# Altium PCB PD_SMARTKEY_EMN-EVAN_V2.0.PcbDoc (part 2 of 2)
Units mm, origin at the board's own origin, x right, y up, seen from the top; angles counter-clockwise.
Board outline 43.7 x 59.1 mm, 2 copper layers (Top Layer, Bottom Layer); 132 components, 88 nets, 381 pads, 398 vias.
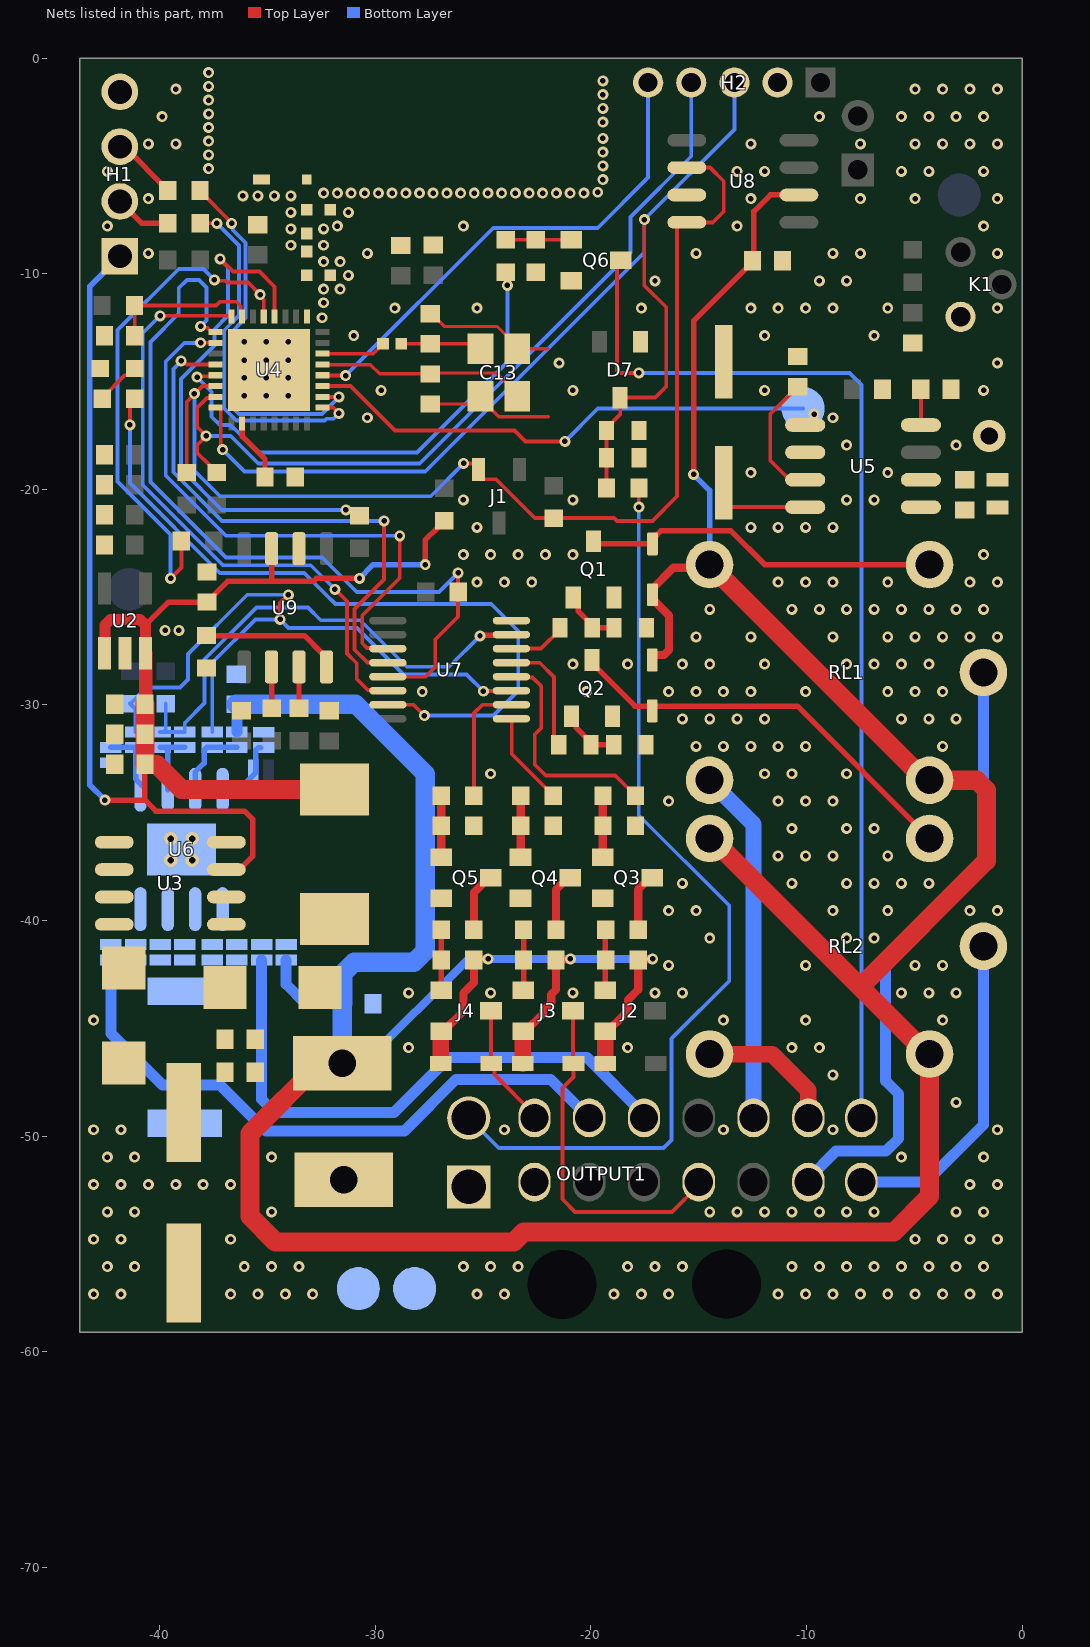
[diagram p2: the nets of this part, all layers, seen from the top]

## Via types
v1: diameter 0.508, hole 0.254, Top Layer to Bottom Layer, tented both sides, 393 vias
v2: diameter 0.61, hole 0.305, Top Layer to Bottom Layer, tented both sides, 4 vias
v3: diameter 1.5, hole 0.8, Top Layer to Bottom Layer, tented both sides, 1 vias

## Nets (pads, with @x,y where several pads share a name; then routed paths per layer and width w, separated by ;. In a path a pad name is that pad's centre, name@x,y a point inside that pad or via, vN(x,y) a via of type N, cw(c..) or ccw(c..) an arc to the next point about the centre after c; other vN are vias at no path point) (continued)
CAR_BUTTON: OUTPUT1.16 R29.1 | length 43.2
  Top Layer w0.178: v1(-17.78,-20.828) -17.78,-19.946 R29.1@-17.773,-19.939
  Bottom Layer w0.178: OUTPUT1.16@-25.669,-49.157 -24.279,-50.546 -16.637,-50.546 -16.269,-50.178 -16.269,-45.479 -13.589,-42.799 -13.589,-39.308 -17.78,-35.117 v1(-17.78,-20.828)
CAR_IGN: D8.2 J4.3 OUTPUT1.15 | length 5.8
  Top Layer w0.178: J4.3@-24.636,-44.18 -24.636,-46.619 D8.2@-24.62,-46.635 -24.48,-46.776 -24.48,-47.148 -22.621,-49.007 OUTPUT1.15@-22.621,-49.157
CAR_LOCK: OUTPUT1.11 RL1.2 | length 16.5
  Bottom Layer w0.762: RL1.2@-14.497,-33.493 -12.461,-35.529 OUTPUT1.11@-12.461,-49.157
CAR_START: D6.2 J3.3 OUTPUT1.5 | length 16.2
  Top Layer w0.178: J3.3@-20.833,-44.18 -20.833,-46.612 D6.2@-20.81,-46.635 -20.81,-47.259 -21.323,-47.772 -21.323,-52.928 -20.738,-53.512 -16.234,-53.512 -15.001,-52.278 OUTPUT1.5@-15.001,-52.128
CAR_TRUNK_B: CN1.2 CN2.2 CN3.2 OUTPUT1.14 | length 29.2
  Bottom Layer w0.508: CN2.2@-42.262,-41.827 -42.262,-45.241 -39.878,-47.625 -37.211,-47.625 -35.078,-49.758 -28.656,-49.758 -26.269,-47.371 -21.866,-47.371 OUTPUT1.14@-20.081,-49.157
CAR_TRUNK_F: CN9.2 CN11.2 CN13.2 OUTPUT1.13 | length 26.7
  Bottom Layer w0.508: CN13.2@-35.277,-41.827 -35.277,-48.289 -34.671,-48.895 -29.13,-48.895 -26.59,-46.355 -20.192,-46.355 -17.541,-49.007 OUTPUT1.13@-17.541,-49.157
CAR_UNLOCK: OUTPUT1.10 RL2.2 | length 6.6
  Top Layer w0.762: RL2.2@-14.497,-46.193 -11.598,-46.193 -9.929,-47.862 -9.929,-49.148 OUTPUT1.10@-9.921,-49.157
CLK: H2.4 R7.1 U4.15 | length 38.1
  Top Layer w0.178: U4.15@-37.403,-15.711 -37.454,-15.762 -37.809,-15.762 -38.259,-16.212 -38.259,-17.113 v1(-37.846,-17.526) -38.259,-17.939 -38.259,-18.313 -37.693,-18.879 -37.693,-18.908 -37.379,-19.222 R7.1@-37.35,-19.222
  Bottom Layer w0.178: v1(-37.846,-17.526) -36.703,-17.526 -35.433,-18.796 -27.94,-18.796 -18.161,-9.017 -18.161,-7.366 -15.347,-4.552 H2.4@-15.347,-1.137
CS2: H2.5 U4.28 | length 23.3
  Top Layer w0.178: U4.28@-32.447,-14.711 -32.44,-14.718 -31.389,-14.718 v1(-31.381,-14.726)
  Bottom Layer w0.178: v1(-31.381,-14.726) -24.529,-7.874 -19.685,-7.874 -17.347,-5.536 H2.5@-17.347,-1.137
D_N: R2.1 U4.25 | length 16.6
  Top Layer w0.178: R2.1@-38.121,-7.665 v1(-37.35,-7.665) ; U4.25@-32.447,-16.211 -31.954,-16.211 v1(-31.686,-16.479)
  Bottom Layer w0.178: v1(-37.35,-7.665) -36.322,-8.693 -36.322,-11.938 -37.008,-12.624 -37.008,-16.255 -36.538,-16.726 -36.448,-16.815 -32.353,-16.815 -32.263,-16.726 -31.933,-16.726 v1(-31.686,-16.479)
D_P: R3.1 U4.26 | length 17.4
  Top Layer w0.178: R3.1@-38.129,-6.141 -38.129,-6.17 -36.664,-7.635 v1(-36.664,-7.665) ; U4.26@-32.447,-15.711 -32.444,-15.714 -31.689,-15.714 v1(-31.686,-15.717)
  Bottom Layer w0.178: v1(-36.664,-7.665) -36.601,-7.728 -36.601,-7.983 -36.017,-8.567 -36.017,-12.064 -36.106,-12.154 -36.703,-12.75 -36.703,-16.129 -36.322,-16.51 -32.479,-16.51 v1(-31.686,-15.717)
DATA_SYN480R: TP5.1 U4.27 U5.5 | length 24.8
  Top Layer w0.178: U4.27@-32.447,-15.211 -31.144,-15.211 -29.083,-17.272 -23.54,-17.272 -23.032,-17.78 v1(-21.209,-17.78) ; U5.5@-10.064,-17.018 -9.861,-17.018 -9.652,-16.809 v1(-9.652,-16.51)
  Bottom Layer w0.178: v1(-21.209,-17.78) -19.685,-16.256 TP5.1@-10.16,-16.256
EN: C14.1 R1.2 U4.7 | length 7
  Top Layer w0.178: C14.1@-41.16,-12.872 -41.16,-11.484 R1.2@-41.169,-11.475 -37.383,-11.475 -37.211,-11.303 -36.449,-11.303 -36.239,-11.513 -36.239,-11.919 U4.7@-36.175,-11.983
FB: C1.1 C2.1 C3.1 C31.1 H1.1 R13.1 U1.2 U2.1 U2.3 U3.3 U9.3 | length 75.3
  Top Layer w0.254: U2.1@-42.552,-27.604 U2.1@-42.545,-27.597 ; v1(-42.545,-34.417) -40.685,-34.417 ; C2.1@-40.685,-32.748 C2.1@-40.685,-32.754 -40.685,-34.417 ; -40.652,-26.301 -39.582,-25.231 C31.1@-37.807,-25.231 -36.862,-24.285 ; U3.3@-36.909,-37.637 -36.303,-37.637 -35.683,-37.017 -35.683,-35.31 -36.068,-34.925 -39.968,-34.925 -40.177,-34.925 -40.685,-34.417 ; -36.844,-24.267 -34.812,-24.267 -32.876,-24.267 -32.739,-24.13 v1(-30.734,-24.13) ; -34.812,-24.242 U9.3@-34.812,-22.755 ; v1(-27.686,-23.495) -27.686,-22.352 -27.102,-21.768 -27.102,-21.739 -26.826,-21.463 R13.1@-26.797,-21.463
  Top Layer w0.508: U2.1@-42.545,-27.597 -42.545,-26.289 -42.291,-26.035 -40.918,-26.035 -40.652,-26.301 U2.3@-40.652,-27.604
  Top Layer w0.635: C3.1@-40.652,-29.927 U2.3@-40.652,-27.604
  Top Layer w0.889: C2.1@-40.685,-32.754 -40.679,-32.76 -40.138,-32.76 -38.975,-33.923 U1.2@-31.889,-33.923 ; C2.1@-40.685,-32.748 C1.1@-40.685,-31.357 C3.1@-40.685,-29.96
  Bottom Layer w0.254: v1(-42.545,-34.417) -43.245,-33.717 -43.245,-10.588 H1.1@-41.846,-9.189 ; v1(-30.734,-24.13) -30.099,-23.495 v1(-27.686,-23.495)
GND: C1.2 C2.2 C3.2 C4.2 C5.2 C6.2 C7.2 C8.2 C9.2 C10.2 C11.2 C12.2 C13.2 C13.4 C14.2 C15.2 C16.2 C17.2 C18.2 C19.2 C20.1 C21.2 C22.2 C23.2 C24.2 C25.2 C26.2 C27.2 C28.2 C29.1 C30.2 C31.2 C32.2 C33.2 CN5.1 CN16.1 D1.2 D7.1 D9.1 H1.4 H2.2 K1.2 L3.1 OUTPUT1.2 Q1.2 Q2.2 Q3.2 Q4.2 Q5.2 Q6.2 R12.1 R16.1 R21.2 R22.2 R26.2 R31.1 R33.2 R34.1 R38.1 RF1.2 TP2.1 TP3.1 U2.2 U3.4 U3.5 U3.6 U3.7 U3.8 U4.33 U5.1 U5.6 U6.9 U7.8 U8.3 U9.2 | length 12.3
  Top Layer w0.152: C17.2@-27.444,-16.047 -25.481,-16.047 C13.4@-25.119,-15.685 -25.119,-15.785 -24.267,-16.637 -21.971,-16.637 ; C18.2@-27.444,-11.853 -27.394,-11.853 -26.801,-12.446 -24.358,-12.446 -23.419,-13.385 C13.2@-23.419,-13.485 -21.994,-13.485
  other v1: -43.065,-57.322 -41.795,-57.322 -36.715,-57.322 -35.445,-57.322 -34.175,-57.322 -32.905,-57.322 -25.285,-57.322 -24.015,-57.322 -18.935,-57.322 -17.665,-57.322 -16.395,-57.322 -11.315,-57.322 -10.045,-57.322 -8.775,-57.322 -7.505,-57.322 -6.235,-57.322 -4.965,-57.322 -3.695,-57.322 -2.425,-57.322 -1.155,-57.322 -42.43,-56.052 -41.16,-56.052 -36.08,-56.052 -34.81,-56.052 -33.54,-56.052 -25.92,-56.052 -24.65,-56.052 -23.38,-56.052 -18.3,-56.052 -17.03,-56.052 -15.76,-56.052 -10.68,-56.052 -9.41,-56.052 -8.14,-56.052 -6.87,-56.052 -5.6,-56.052 -4.33,-56.052 -3.06,-56.052 -1.79,-56.052 -43.065,-54.782 -41.795,-54.782 -36.715,-54.782 -4.965,-54.782 -3.695,-54.782 -2.425,-54.782 -1.155,-54.782 -42.43,-53.512 -41.16,-53.512 -34.81,-53.512 -14.49,-53.512 -13.22,-53.512 -11.95,-53.512 -10.68,-53.512 -9.41,-53.512 -8.14,-53.512 -6.87,-53.512 -3.06,-53.512 -1.79,-53.512 -43.065,-52.242 -41.795,-52.242 -40.525,-52.242 -39.255,-52.242 -37.985,-52.242 -36.715,-52.242 -2.425,-52.242 -1.155,-52.242 -42.43,-50.972 -41.16,-50.972 -34.81,-50.972 -5.6,-50.972 -1.79,-50.972 -43.065,-49.702 -41.795,-49.702 -24.015,-49.702 -13.855,-49.702 -8.775,-49.702 -1.155,-49.702 -3.06,-48.432 -8.775,-47.162 -28.46,-45.892 -18.3,-45.892 -10.68,-45.892 -9.41,-45.892 -43.065,-44.622 -13.855,-44.622 -10.045,-44.622 -3.695,-44.622 -28.46,-43.352 -24.65,-43.352 -20.84,-43.352 -17.03,-43.352 -15.76,-43.352 -5.6,-43.352 -4.33,-43.352 -3.06,-43.352 -16.395,-42.082 -10.045,-42.082 -4.965,-42.082 -3.695,-42.082 -14.49,-40.812 -8.14,-40.812 -6.87,-40.812 -16.395,-39.542 -15.125,-39.542 -8.775,-39.542 -6.235,-39.542 -2.425,-39.542 -1.155,-39.542 -15.76,-38.272 -10.68,-38.272 -8.14,-38.272 -6.87,-38.272 -5.6,-38.272 -4.33,-38.272 -11.315,-37.002 -10.045,-37.002 -8.775,-37.002 -6.235,-37.002 -10.68,-35.732 -8.14,-35.732 -6.87,-35.732 -16.395,-34.462 -11.315,-34.462 -10.045,-34.462 -8.775,-34.462 -24.65,-33.192 -11.95,-33.192 -10.68,-33.192 -8.14,-33.192 -15.125,-31.922 -13.855,-31.922 -12.585,-31.922 -11.315,-31.922 -10.045,-31.922 -3.695,-31.922 -15.76,-30.652 -14.49,-30.652 -13.22,-30.652 -11.95,-30.652 -5.6,-30.652 -4.33,-30.652 -3.06,-30.652 -27.825,-29.382 -20.205,-29.382 -16.395,-29.382 -15.125,-29.382 -13.855,-29.382 -12.585,-29.382 -10.045,-29.382 -6.235,-29.382 -4.965,-29.382 -3.695,-29.382 -20.84,-28.112 -18.3,-28.112 -15.76,-28.112 -14.49,-28.112 -11.95,-28.112 -8.14,-28.112 -6.87,-28.112 -5.6,-28.112 -4.33,-28.112 -15.125,-26.842 -12.585,-26.842 -8.775,-26.842 -6.235,-26.842 -4.965,-26.842 -3.695,-26.842 -2.425,-26.842 -1.155,-26.842 -39.751,-26.543 -39.116,-26.543 -14.49,-25.572 -10.68,-25.572 -9.41,-25.572 -8.14,-25.572 -6.87,-25.572 -5.6,-25.572 -4.33,-25.572 -3.06,-25.572 -1.79,-25.572 -25.285,-24.302 -24.015,-24.302 -22.745,-24.302 -11.315,-24.302 -10.045,-24.302 -8.775,-24.302 -6.235,-24.302 -2.425,-24.302 -1.155,-24.302 -25.92,-23.032 -24.65,-23.032 -23.38,-23.032 -22.11,-23.032 -20.84,-23.032 -1.79,-23.032 -25.285,-21.762 -12.585,-21.762 -11.315,-21.762 -10.045,-21.762 -8.775,-21.762 -25.92,-20.492 -20.84,-20.492 -8.14,-20.492 -6.87,-20.492 -12.585,-19.222 -6.235,-19.222 -8.14,-17.952 -3.06,-17.952 -30.365,-16.682 -8.775,-16.682 -36.08,-15.666 -35.064,-15.666 -34.048,-15.666 -29.73,-15.412 -20.84,-15.412 -11.95,-15.412 -1.79,-15.412 -36.08,-14.828 -35.064,-14.828 -34.048,-14.828 -21.475,-14.142 -1.155,-14.142 -36.08,-14.015 -35.064,-14.015 -34.048,-14.015 -36.08,-13.151 -35.064,-13.151 -34.048,-13.151 -31,-12.872 -11.95,-12.872 -6.87,-12.872 -32.464,-12.043 -29.095,-11.602 -25.285,-11.602 -17.665,-11.602 -12.585,-11.602 -11.315,-11.602 -10.045,-11.602 -8.775,-11.602 -6.235,-11.602 -1.155,-11.602 -32.397,-11.348 -32.397,-10.713 -31.635,-10.713 -17.03,-10.332 -9.41,-10.332 -8.14,-10.332 -31.254,-10.078 -32.397,-9.443 -31.635,-9.443 -40.525,-9.062 -30.365,-9.062 -15.125,-9.062 -8.775,-9.062 -7.505,-9.062 -1.155,-9.062 -33.921,-8.681 -32.397,-8.681 -33.921,-7.919 -32.397,-7.919 -42.43,-7.792 -31.762,-7.792 -25.92,-7.792 -13.22,-7.792 -1.79,-7.792 -33.921,-7.157 -31.254,-7.157 -40.525,-6.522 -12.585,-6.522 -7.505,-6.522 -4.965,-6.522 -1.155,-6.522 -36.141,-6.395 -35.445,-6.395 -34.683,-6.395 -33.921,-6.395 -32.397,-6.268 -31.762,-6.268 -31.127,-6.268 -30.492,-6.268 -29.857,-6.268 -29.222,-6.268 -28.587,-6.268 -27.952,-6.268 -27.317,-6.268 -26.682,-6.268 -26.047,-6.268 -25.412,-6.268 -24.777,-6.268 -24.142,-6.268 -23.507,-6.268 -22.872,-6.268 -22.237,-6.268 -21.602,-6.268 -20.967,-6.268 -20.332,-6.268 -19.685,-6.223 -19.443,-5.633 -42.43,-5.252 -13.22,-5.252 -11.95,-5.252 -5.6,-5.252 -4.33,-5.252 -1.79,-5.252 -37.731,-5.125 -19.443,-4.998 -37.731,-4.49 -19.443,-4.363 -40.525,-3.982 -39.255,-3.982 -12.585,-3.982 -7.505,-3.982 -4.965,-3.982 -3.695,-3.982 -2.425,-3.982 -1.155,-3.982 -37.731,-3.855 -19.443,-3.728 -37.731,-3.22 -19.443,-2.966 -39.89,-2.712 -9.41,-2.712 -5.6,-2.712 -4.33,-2.712 -3.06,-2.712 -1.79,-2.712 -37.731,-2.585 -19.443,-2.331 -37.731,-1.95 -19.443,-1.696 -39.255,-1.442 -4.965,-1.442 -3.695,-1.442 -2.425,-1.442 -1.155,-1.442 -37.731,-1.315 -19.443,-1.061 -37.731,-0.68
  other v2: -39.489,-37.203 -38.489,-37.203 -39.489,-36.203 -38.489,-36.203
HC595-CLK: U4.10 U7.11 | length 27
  Top Layer w0.178: v1(-38.1,-13.203) -38.096,-13.207 -37.407,-13.207 U4.10@-37.403,-13.211 ; U7.11@-29.421,-27.391 -29.452,-27.359 -30.384,-27.359 -30.606,-27.137 -30.606,-25.848 -28.867,-24.109 v1(-28.867,-22.156)
  Bottom Layer w0.178: v1(-38.1,-13.203) -38.109,-13.211 -38.865,-13.211 -39.721,-14.067 -39.721,-19.36 -36.924,-22.156 v1(-28.867,-22.156)
HC595-DATA: U4.8 U7.14 | length 28.7
  Top Layer w0.178: v1(-39.982,-11.954) -36.704,-11.954 U4.8@-36.675,-11.983 ; v1(-31.873,-24.638) -31.317,-25.194 -31.317,-27.616 -30.863,-28.07 -30.863,-28.802 -30.352,-29.314 -29.448,-29.314 U7.14@-29.421,-29.341
  Bottom Layer w0.178: v1(-39.982,-11.954) -40.787,-12.759 -40.787,-19.802 -37.069,-23.52 -32.995,-23.52 -31.877,-24.638 v1(-31.873,-24.638)
HC595-ENABLE: R6.1 U4.9 U7.13 | length 37.8
  Top Layer w0.178: v1(-38.1,-12.446) -38.037,-12.509 -37.789,-12.509 -37.588,-12.711 U4.9@-37.403,-12.711 ; U7.13@-29.421,-28.691 -27.675,-28.691 -27.222,-28.238 -27.222,-26.968 -26.162,-25.908 R6.1@-26.162,-24.765 v1(-26.162,-23.876)
  Bottom Layer w0.178: v1(-38.1,-12.446) -37.824,-12.17 -37.824,-10.642 -38.179,-10.287 -38.735,-10.287 -39.116,-10.668 -39.116,-11.847 -40.432,-13.163 -40.432,-19.654 -36.922,-23.165 -32.461,-23.165 -30.861,-24.765 -27.051,-24.765 v1(-26.162,-23.876)
HC595-LATCH: U4.12 U7.12 | length 26
  Top Layer w0.178: v1(-39.004,-14.045) -38.915,-14.045 -38.745,-14.215 -37.407,-14.215 U4.12@-37.403,-14.211 ; v1(-29.591,-21.463) -29.591,-24.184 -30.962,-25.555 -30.962,-27.439 -30.369,-28.031 -29.43,-28.031 U7.12@-29.421,-28.041
  Bottom Layer w0.178: v1(-39.004,-14.045) -39.004,-14.06 -39.365,-14.42 -39.365,-19.213 -37.115,-21.463 v1(-29.591,-21.463)
LED_STATUS: R39.1 U7.15 | length 34.4
  Top Layer w0.178: v1(-41.385,-17.013) -41.385,-16.018 R39.1@-41.16,-15.793 ; U7.15@-29.421,-29.991 -28.232,-29.991 v1(-27.729,-30.494)
  Bottom Layer w0.178: v1(-41.385,-17.013) -41.385,-19.707 -37.216,-23.876 -33.296,-23.876 -32.343,-24.829 -32.343,-24.833 -32.068,-25.108 -32.064,-25.108 -31.848,-25.324 -24.627,-25.324 -23.368,-26.583 -23.368,-29.337 -24.525,-30.494 v1(-27.729,-30.494)
LOCK_CCH: OUTPUT1.9 Q6.3 | length 50.8
  Top Layer w0.178: Q6.3@-18.61,-9.379 -18.796,-9.565 -18.796,-14.501 -18.692,-14.605 v1(-17.78,-14.605)
  Bottom Layer w0.178: v1(-17.78,-14.605) -8.001,-14.605 -7.457,-15.149 OUTPUT1.9@-7.457,-49.157
LV-MD125KHZ: J1.2 R8.1 R14.2 U4.14 U8.2 U8.4 | length 51.9
  Top Layer w0.178: R8.1@-38.747,-19.222 -38.747,-15.944 -38.388,-15.586 v1(-38.388,-15.566) -38.364,-15.566 -38.008,-15.211 U4.14@-37.403,-15.211 ; v1(-25.908,-18.796) -25.407,-18.796 J1.2@-25.313,-18.89 ; J1.2@-25.207,-19.085 -25.207,-19.32 -24.996,-19.531 -24.411,-19.531 -22.606,-21.336 R14.2@-21.717,-21.336 -18.923,-21.336 -18.796,-21.463 -17.145,-21.463 -16.002,-20.32 -16.002,-7.809 -15.813,-7.62 U8.4@-15.554,-7.62 -14.351,-7.62 -13.843,-7.112 -13.843,-5.715 -14.478,-5.08 U8.2@-15.554,-5.08
  Bottom Layer w0.178: v1(-38.388,-15.566) -38.388,-19.143 -37.211,-20.32 -27.432,-20.32 v1(-25.908,-18.796)
MCU_ACC: R23.1 U7.4 | length 10.6
  Top Layer w0.178: U7.4@-23.689,-28.691 -23.658,-28.723 -22.712,-28.723 -22.304,-29.131 -22.304,-31.067 -22.606,-31.369 -22.606,-32.766 -22.098,-33.274 -18.87,-33.274 -18.279,-33.865 -18.251,-33.865 -17.936,-34.179 R23.1@-17.936,-34.208
MCU_BUTTON: C29.2 D7.3 H2.3 R29.2 R34.2 U4.16 | length 51
  Top Layer w0.178: U4.16@-37.403,-16.211 -37.218,-16.211 -37.166,-16.262 -37.166,-17.989 -37.084,-18.072 v1(-37.084,-18.161) ; R29.2@-19.28,-19.939 C29.2@-19.28,-18.542 R34.2@-19.28,-17.272 -19.28,-17.172 -18.645,-16.537 D7.3@-18.645,-15.748 -17.018,-15.748 -16.51,-15.24 -16.51,-11.557 -17.526,-10.541 v1(-17.526,-7.493)
  Bottom Layer w0.178: v1(-37.084,-18.161) -36.068,-19.177 -27.686,-19.177 -17.526,-9.017 v1(-17.526,-7.493) -13.347,-3.314 H2.3@-13.347,-1.137
MCU_IGN: R35.1 U7.2 | length 5.7
  Top Layer w0.178: R35.1@-25.429,-34.208 -25.429,-30.382 -25.038,-29.991 U7.2@-23.689,-29.991
MCU_LOCK: R10.2 U7.6 | length 2.7
  Top Layer w0.178: U7.6@-23.689,-27.391 -22.314,-27.391 -21.439,-26.516 R10.2@-21.439,-26.416
MCU_LOCK_CCH: R32.1 U4.13 | length 23.3
  Top Layer w0.178: v1(-38.265,-14.802) -38.219,-14.756 -37.448,-14.756 U4.13@-37.403,-14.711 ; R32.1@-23.957,-9.936 -23.876,-10.017 v1(-23.876,-10.541)
  Bottom Layer w0.178: v1(-38.265,-14.802) -37.592,-15.475 -37.592,-16.637 -37.211,-17.018 -36.748,-17.018 -36.596,-17.17 -36.551,-17.17 -35.433,-18.288 -28.067,-18.288 -23.876,-14.097 v1(-23.876,-10.541)
MCU_START: R27.1 U7.1 | length 4.4
  Top Layer w0.178: U7.1@-23.689,-30.641 -23.671,-30.659 -23.671,-32.283 -22.089,-33.865 -22.061,-33.865 -21.746,-34.179 R27.1@-21.746,-34.208
MCU_TRUNK_B: CN7.1 CN8.1 R17.1 U7.7 | length 23.3
  Top Layer w0.254: v1(-25.146,-26.797) -25.107,-26.758 -23.706,-26.758 U7.7@-23.689,-26.741
  Bottom Layer w0.178: CN7.1@-39.984,-31.261 CN7.1@-39.845,-31.261 ; R17.1@-39.722,-29.94 -39.722,-31.138 CN7.1@-39.845,-31.261 ; v1(-25.146,-26.797) -26.581,-28.232 -28.542,-28.232 -30.703,-26.071 -32.535,-26.071 -33.128,-25.478 -35.516,-25.478 -37.918,-27.88 -37.918,-29.917 -38.841,-30.84 CN8.1@-38.841,-31.261 CN7.1@-39.845,-31.261
MCU_TRUNK_F: CN6.1 CN12.1 R18.1 U7.3 | length 32.2
  Top Layer w0.178: v1(-34.417,-26.035) -34.417,-25.273 v1(-34.036,-24.892) ; v1(-24.99,-29.367) -24.977,-29.354 -23.702,-29.354 U7.3@-23.689,-29.341
  Bottom Layer w0.178: CN6.1@-41.119,-31.261 -41.119,-30.194 R18.1@-41.373,-29.94 -41.344,-29.94 -41.03,-29.626 -41.03,-29.597 -40.627,-29.195 -39.055,-29.195 -38.681,-28.82 -38.681,-27.632 -35.941,-24.892 v1(-34.036,-24.892) ; CN12.1@-37.563,-31.261 -37.563,-28.038 -35.56,-26.035 -34.402,-26.035 -34.402,-26.05 -34.025,-26.427 -30.85,-26.427 -28.689,-28.588 -25.769,-28.588 v1(-24.99,-29.367)
MCU_UNLOCK: R15.2 U7.5 | length 5.5
  Top Layer w0.178: U7.5@-23.689,-28.041 -22.378,-28.041 -21.717,-28.702 -21.717,-31.63 R15.2@-21.494,-31.853
MOTOR_LOCK: OUTPUT1.7 RL1.1 | length 28.9
  Bottom Layer w0.508: OUTPUT1.7@-9.921,-52.128 -9.921,-51.978 -8.635,-50.693 -6.311,-50.693 -5.727,-50.108 -5.727,-48.051 -6.346,-47.432 -6.346,-41.779 -1.797,-37.23 RL1.1@-1.797,-28.493
MOTOR_UNLOCK: OUTPUT1.8 RL2.1 | length 15
  Bottom Layer w0.508: OUTPUT1.8@-7.457,-52.128 -4.455,-52.128 -1.797,-49.471 RL2.1@-1.797,-41.193
NetC6_1: C6.1 C7.1 C8.1 D2.1 U3.1
NetC15_1: C15.1 L1.2 U4.1
NetC16_1: C16.1 L1.1 RF1.1
NetC19_1: C19.1 U4.18 | length 2.9
  Top Layer w0.254: U4.18@-36.175,-16.938 -36.162,-16.951 -36.162,-17.555 -35.117,-18.6 C19.1@-35.117,-19.431
NetC21_1: C21.1 U5.8 | length 4.5
  Top Layer w0.178: C21.1@-13.843,-19.945 -13.843,-20.517 -13.532,-20.828 U5.8@-10.064,-20.828
NetC22_1: C22.1 U5.7 | length 6
  Top Layer w0.178: C22.1@-10.414,-15.24 -10.464,-15.24 -10.775,-15.551 -10.775,-15.601 -11.684,-16.51 -11.684,-18.669 -10.795,-19.558 U5.7@-10.064,-19.558
NetC24_1: C24.1 L3.2 U5.2
  other v3: -1.524,-17.526
NetC25_1: C25.1 U5.4 | length 1.7
  Top Layer w0.178: U5.4@-4.699,-17.018 C25.1@-4.699,-15.367
NetCN1_1: CN1.1 CN2.1 U6.8
NetCN3_1: CN3.1 CN4.1 U6.7
NetCN4_2: CN4.2 R21.1
NetCN5_2: CN5.2 CN6.2 U6.1 | length 3.1
  Bottom Layer w0.254: CN5.2@-42.262,-31.972 CN6.2@-41.119,-31.972 -41.119,-33.43 U6.1@-40.799,-33.75
NetCN7_2: CN7.2 CN8.2 U6.2 | length 3.2
  Bottom Layer w0.254: CN7.2@-39.984,-31.972 CN7.2@-39.747,-31.972 ; U6.2@-39.624,-33.934 -39.624,-32.095 CN7.2@-39.747,-31.972 ; CN8.2@-38.841,-31.972 CN7.2@-39.747,-31.972
NetCN9_1: CN9.1 CN11.1 U6.6
NetCN10_2: CN10.2 CN12.2 U6.3 | length 3.6
  Bottom Layer w0.254: U6.3@-38.354,-33.934 -38.354,-33.115 -37.936,-32.697 -37.936,-32.095 -37.813,-31.972 CN12.2@-37.563,-31.972 CN10.2@-36.42,-31.972
NetCN13_1: CN13.1 CN14.1 U6.5
NetCN15_2: CN15.2 CN16.2 U6.4 | length 3.5
  Bottom Layer w0.254: U6.4@-36.936,-33.75 -37.084,-33.898 U6.4@-37.084,-33.934 -36.347,-33.934 -36.195,-33.782 -36.174,-33.782 -35.547,-33.156 -35.547,-32.102 -35.424,-31.979 CN16.2@-35.306,-31.979
NetD1_1: D1.1 U1.1 U3.2
NetD3_1: D3.1 Q1.3 RL1.4 | length 16.7
  Top Layer w0.254: Q1.3@-19.873,-22.419 -19.76,-22.532 D3.1@-17.145,-22.532 -17.145,-22.252 -17.022,-22.129 -16.96,-22.129 -16.759,-21.928 -13.505,-21.928 -11.94,-23.493 RL1.4@-4.297,-23.493
NetD4_1: D4.1 Q2.3 RL2.4 | length 19.4
  Top Layer w0.254: Q2.3@-19.954,-27.917 -19.954,-28.067 -17.961,-30.06 D4.1@-17.16,-30.06 ; D4.1@-17.16,-30.277 D4.1@-17.16,-30.06 ; RL2.4@-4.297,-36.193 -10.43,-30.06 D4.1@-17.16,-30.06
NetD9_2: D9.2 R39.2 | length 2.1
  Top Layer w0.178: R39.2@-42.667,-15.793 -42.667,-15.764 -41.61,-14.707 -41.471,-14.707 D9.2@-41.16,-14.396
NetH1_2: H1.2 R2.2 | length 2.6
  Top Layer w0.254: H1.2@-41.846,-6.649 -40.83,-7.665 R2.2@-39.627,-7.665
NetH1_3: H1.3 R3.2 | length 3.1
  Top Layer w0.254: H1.3@-41.846,-4.109 -41.639,-4.109 -39.636,-6.112 R3.2@-39.636,-6.141
NetJ2_1: J2.1 R19.2 R20.1 | length 2.8
  Top Layer w0.254: J2.1@-19.33,-43.23 -19.33,-40.445 R20.1@-19.316,-40.431
NetJ3_1: J3.1 R24.2 R25.1 | length 2.8
  Top Layer w0.254: J3.1@-23.133,-43.23 -23.126,-43.223 R24.2@-23.126,-41.828 R25.1@-23.126,-40.431
NetJ4_1: J4.1 R28.2 R30.1 | length 2.8
  Top Layer w0.254: J4.1@-26.936,-43.23 R28.2@-26.936,-41.828 R30.1@-26.936,-40.431
NetL2_1: L2.1 U4.30 | length 3
  Top Layer w0.152: U4.30@-32.447,-13.711 -30.099,-13.711 L2.1@-29.642,-13.253
NetQ1_1: Q1.1 R10.1 R12.2 | length 2.8
  Top Layer w0.254: Q1.1@-20.823,-25.019 -20.6,-25.242 -20.6,-25.655 -19.939,-26.316 R10.1@-19.939,-26.416 R12.2@-18.923,-26.416
NetQ2_1: Q2.1 R15.1 R16.2 | length 2.8
  Top Layer w0.254: Q2.1@-20.904,-30.517 -20.681,-30.74 -20.681,-31.066 -19.994,-31.753 R15.1@-19.994,-31.853 R16.2@-18.942,-31.853
NetQ3_1: Q3.1 R22.1 R23.2 | length 2.9
  Top Layer w0.381: Q3.1@-19.457,-37.068 -19.45,-37.061 -19.45,-34.215 R23.2@-19.443,-34.208
NetQ3_3: Q3.3 R20.2 | length 2.7
  Top Layer w0.381: R20.2@-17.809,-40.431 -17.809,-38.57 -17.257,-38.018 Q3.3@-17.157,-38.018
NetQ4_1: Q4.1 R26.1 R27.2 | length 2.9
  Top Layer w0.381: Q4.1@-23.267,-37.068 -23.26,-37.061 -23.26,-34.215 R27.2@-23.253,-34.208
NetQ4_3: Q4.3 R25.2 | length 2.7
  Top Layer w0.381: R25.2@-21.619,-40.431 -21.619,-38.57 -21.067,-38.018 Q4.3@-20.967,-38.018
NetQ5_1: Q5.1 R33.1 R35.2 | length 2.9
  Top Layer w0.381: Q5.1@-26.95,-37.068 -26.943,-37.061 -26.943,-34.215 R35.2@-26.936,-34.208
NetQ5_3: Q5.3 R30.2 | length 2.8
  Top Layer w0.381: R30.2@-25.429,-40.431 -25.429,-38.697 -24.75,-38.018 Q5.3@-24.65,-38.018
NetQ6_1: Q6.1 R31.2 R32.2 | length 3
  Top Layer w0.178: R32.2@-23.957,-8.429 R31.2@-22.56,-8.429 Q6.1@-20.909,-8.429
NetR4_2: R4.2 U4.4 | length 24.4
  Top Layer w0.178: v1(-37.198,-9.316) -36.608,-9.906 -35.376,-9.906 -34.675,-10.607 U4.4@-34.675,-11.983 ; v1(-31.369,-20.955) -31.005,-20.955 R4.2@-30.734,-21.226
  Bottom Layer w0.178: v1(-37.198,-9.316) -36.83,-9.685 -36.83,-11.943 -37.465,-12.578 -37.465,-13.335 -39.009,-14.879 -39.009,-19.065 -37.12,-20.955 v1(-31.369,-20.955)
NetR5_2: R5.2 U4.5 | length 23.8
  Top Layer w0.178: v1(-39.497,-24.13) -38.992,-23.625 R5.2@-38.992,-22.397 ; v1(-37.465,-10.287) -37.427,-10.325 -36.944,-10.325 -36.855,-10.414 -35.896,-10.414 v1(-35.343,-10.967) -35.343,-11.056 -35.175,-11.225 U4.5@-35.175,-11.983
  Bottom Layer w0.178: v1(-39.497,-24.13) -39.497,-22.098 -41.956,-19.639 -41.956,-12.619 -39.116,-9.779 -37.973,-9.779 v1(-37.465,-10.287)
NetR36_1: R36.1 U9.6 | length 1.9
  Top Layer w0.254: R36.1@-34.81,-30.161 U9.6@-34.81,-28.239
NetR37_1: R37.1 U9.7 | length 1.9
  Top Layer w0.254: R37.1@-33.54,-30.161 U9.7@-33.54,-28.239
NetR38_2: R38.2 U9.8 | length 6.4
  Top Layer w0.254: R38.2@-37.833,-26.783 -33.288,-26.783 -32.467,-27.604 -32.448,-27.604 -32.27,-27.782 U9.8@-32.27,-28.239
VCC: OUTPUT1.1 OUTPUT1.18
VCC-B: C26.1 C27.1 C30.1 CN10.1 CN14.2 D2.2 D3.2 D4.2 D5.1 D6.1 D8.1 J2.2 J3.2 J4.2 OUTPUT1.17 R19.1 R24.1 R28.1 RL1.3 RL1.5 RL2.3 RL2.5 U8.6 | length 186.9
  Top Layer w0.254: v1(-15.24,-19.304) -15.24,-12.192 -12.784,-9.736 -12.784,-9.721 -12.461,-9.398 -12.446,-9.398 -12.446,-7.112 -11.684,-6.35 U8.6@-10.354,-6.35
  Top Layer w0.381: J4.2@-26.936,-45.13 -26.836,-45.13 -25.914,-44.208 -25.914,-43.369 -25.429,-42.884 R28.1@-25.429,-41.828 -25.384,-41.783 v1(-24.765,-41.783) ; J3.2@-23.156,-45.149 -23.052,-45.149 -22.225,-44.322 -22.225,-44.196 -21.844,-43.815 -21.844,-43.434 -21.619,-43.209 R24.1@-21.619,-41.828 -21.597,-41.805 -20.977,-41.805 v1(-20.955,-41.783) ; J2.2@-19.33,-45.13 -19.23,-45.13 -18.519,-44.419 -18.511,-44.419 -18.288,-44.196 -18.288,-43.688 -17.809,-43.209 R19.1@-17.809,-41.828 -17.787,-41.805 -17.167,-41.805 v1(-17.145,-41.783) ; D4.2@-17.16,-27.917 -17.16,-27.741 -17.1,-27.681 -16.606,-27.681 -16.383,-27.458 -16.383,-25.849 -17,-25.232 -17.086,-25.232 -17.145,-25.172 -17.145,-24.612 -16.168,-23.635 -14.639,-23.635 RL1.3@-14.497,-23.493
  Top Layer w0.762: D8.1@-26.966,-46.635 -26.966,-45.149 -26.947,-45.13 J4.2@-26.936,-45.13 ; D6.1@-23.156,-46.635 J3.2@-23.156,-45.149 ; D5.1@-19.346,-46.635 -19.338,-46.627 -19.338,-45.138 J2.2@-19.33,-45.13
  Top Layer w0.889: OUTPUT1.17@-31.536,-46.617 -32.552,-46.617 -35.814,-49.879 -35.814,-53.721 -34.626,-54.909 -23.583,-54.909 -23.126,-54.452 -5.956,-54.452 -4.297,-52.793 RL2.5@-4.297,-46.193 -4.397,-46.193 -7.511,-43.079 ; RL2.3@-14.497,-36.193 -14.397,-36.193 -7.511,-43.079 ; RL1.3@-14.497,-23.493 -4.497,-33.493 -2.109,-33.493 -1.663,-33.939 -1.663,-37.231 -7.511,-43.079
  Bottom Layer w0.254: C26.1@-36.449,-29.972 C26.1@-36.42,-30.001 ; v1(-15.24,-19.304) -14.497,-20.047 -14.497,-23.201 RL1.3@-14.351,-23.347
  Bottom Layer w0.381: OUTPUT1.17@-31.536,-46.617 -30.52,-46.617 -25.686,-41.783 v1(-24.765,-41.783) v1(-20.955,-41.783) v1(-17.145,-41.783)
  Bottom Layer w0.508: CN10.1@-36.42,-31.261 C26.1@-36.42,-30.001 ; CN14.2@-34.134,-41.827 -34.134,-42.955 -33.235,-43.854 -31.536,-43.854 C27.1@-31.507,-43.854
  Bottom Layer w0.889: C26.1@-36.449,-29.972 -30.912,-29.972 -27.686,-33.198 -27.686,-41.414 -28.207,-41.934 -30.986,-41.934 -31.507,-42.455 C27.1@-31.507,-43.854 ; OUTPUT1.17@-31.536,-46.617 C27.1@-31.536,-43.854 ; RL1.3@-14.497,-23.493 RL1.3@-14.351,-23.347
XIN: C13.1 C17.1 U4.29 | length 9.7
  Top Layer w0.152: U4.29@-32.447,-14.211 -32.434,-14.224 -30.226,-14.224 -29.803,-14.647 C17.1@-27.444,-14.647 -27.402,-14.605 -24.399,-14.605 -23.419,-15.585 C13.1@-23.419,-15.685
XOUT: C13.3 C18.1 L2.2 | length 3.8
  Top Layer w0.178: L2.2@-28.802,-13.253 C18.1@-27.444,-13.253 -25.351,-13.253 C13.3@-25.119,-13.485
pads on no net: K1.3 OUTPUT1. U2.4 U4.19 U4.20 U4.21 U4.22 U4.23 U4.24 U7.9 U8.1 U8.8 U9.5

## Polygon pours and split planes (outlines as drawn)
GND on Bottom Layer "NONET_L-01_P-001" (solid, pour order 1): -43.7,-59.1 0,-59.1 0,0 -43.7,0
GND on Top Layer "NONET_L-01_P-001" (solid, pour order 0): -43.7,-59.1 0,-59.1 0,0 -43.7,0

## Keep-outs
Keep-Out Layer:
  the board outline again, w0.3

## Other copper
Top Layer:
  pour cut-out: -28.575,-33.401 -28.575,-40.386 -35.179,-40.386 -35.179,-33.401
  region net NetC24_1: -4.699,-19.243 -3.202,-19.243 -3.117,-19.158 -2.354,-19.158 -2.354,-17.214 -1.904,-16.764 -1.143,-16.764 -0.635,-17.272 -0.635,-19.88 -0.713,-19.958 -3.117,-19.958 -3.202,-19.873 -4.699,-19.873
  region net NetD1_1: -40.668,-43.209 -40.668,-41.811 -38.058,-39.201 -35.602,-39.201 -33.68,-41.123 -30.289,-41.123 -30.289,-38.723 -33.489,-38.723 -33.599,-38.613 -38.867,-38.613 -41.463,-41.209 -42.668,-41.209 -42.668,-43.209 -42.668,-41.209 -42.668,-43.209
  region net +3.3: -42.852,-25.354 -42.252,-25.354 -42.252,-24.524 -40.76,-23.032 -40.76,-17.941 -41.56,-17.941 -41.56,-22.764 -42.65,-23.854 -42.852,-23.854
  region net NetC6_1: -35.969,-42.098 -35.969,-44.461 -36.569,-45.061 -36.569,-47.485 -38.074,-48.99 -38.074,-51.199 -39.674,-51.199 -39.674,-41.706 -37.851,-39.883 -36.909,-39.883 -36.909,-40.471 -37.042,-40.471 -38.481,-41.91 -38.481,-46.192 -38.074,-46.599 -38.06,-46.585 -37.369,-46.585 -37.369,-45.061 -37.969,-44.461 -37.969,-42.098
  region net VCC-B: -33.822,-47.887 -33.822,-44.351 -33.569,-44.098 -33.569,-42.098 -31.569,-42.098 -31.569,-44.098 -30.32,-45.347 -29.25,-45.347 -29.25,-47.887
  region net +3.3: -32.772,-12.571 -32.122,-12.571 -32.122,-13.351 -32.772,-13.351
  region net +3.3: -34.315,-11.658 -33.535,-11.658 -33.535,-12.308 -34.315,-12.308
  region net VCC: -24.669,-51.357 -28.574,-51.357 -29.174,-50.757 -33.746,-50.757 -33.746,-53.297 -29.174,-53.297 -29.114,-53.357 -24.669,-53.357
  region net GND: -35.678,-5.408 -35.724,-5.454 -35.724,-5.852 -35.734,-5.862 -36.08,-5.862 -36.08,-6.344 -34.632,-6.344 -34.632,-5.862 -34.635,-5.859 -34.831,-5.859 -34.831,-5.455 -34.878,-5.408
  region net NetC16_1: -33.445,-8.404 -33.445,-5.872 -33.4,-5.827 -33.4,-5.408 -32.95,-5.408 -32.95,-5.858 -32.932,-5.858 -32.905,-5.885 -32.905,-8.404
  region net NetC15_1: -33.035,-12.308 -33.035,-11.658 -32.905,-11.528 -32.905,-8.704 -33.445,-8.704 -33.445,-10.348 -33.445,-11.528 -33.315,-11.658 -33.315,-12.308
  pour cut-out: -28.384,-11.043 -26.377,-11.043 -26.377,-12.212 -22.288,-12.212 -22.288,-16.911 -28.384,-16.911 -28.384,-12.999
  pour cut-out: -35.724,-5.836 -34.835,-5.836 -34.814,-5.858 -19.875,-5.858 -19.875,0.006 -37.248,0.006 -37.248,-5.859 -35.731,-5.859
Bottom Layer:
  pour cut-out: -28.575,-34.29 -28.575,-40.386 -35.179,-40.386 -35.179,-34.29
  region net NetCN13_1: -35.777,-41.366 -35.777,-40.804 -36.09,-40.491 -37.203,-40.491 -37.371,-40.323 -37.371,-38.74 -37.371,-38.621 -37.203,-38.453 -36.047,-38.453 -33.634,-40.866 -33.634,-41.366
  region net NetCN9_1: -38.063,-41.366 -38.063,-40.866 -38.098,-40.866 -38.641,-40.323 -38.641,-38.621 -38.473,-38.453 -38.235,-38.453 -38.067,-38.621 -38.067,-40.135 -37.336,-40.866 -35.92,-40.866 -35.92,-41.366
  region net NetCN3_1: -40.476,-41.366 -40.476,-40.769 -39.911,-40.204 -39.911,-38.621 -39.743,-38.453 -39.505,-38.453 -39.337,-38.621 -39.337,-40.204 -38.675,-40.866 -38.333,-40.866 -38.333,-41.366
  region net NetCN1_1: -42.762,-41.366 -42.762,-40.202 -41.013,-38.453 -40.775,-38.453 -40.607,-38.621 -40.607,-40.854 -40.619,-40.866 -40.619,-41.366
  region net CAR_TRUNK_B: -39.476,-42.077 -39.476,-41.577 -42.762,-41.577 -42.762,-42.077
  region net CAR_TRUNK_F: -38.063,-41.577 -34.777,-41.577 -34.777,-42.077 -38.063,-42.077
  region net NetCN4_2: -39.333,-41.577 -39.333,-42.345 -39.622,-42.634 -40.561,-42.634 -40.561,-43.916 -37.105,-43.916 -37.105,-42.634 -38.011,-42.634 -38.333,-42.312 -38.333,-41.577
  region net +3.3: -41.805,-28.03 -39.29,-28.03 -39.29,-28.837 -41.805,-28.837
  pour cut-out: -35.724,-5.836 -34.835,-5.836 -34.814,-5.858 -19.875,-5.858 -19.875,0.006 -37.248,0.006 -37.248,-5.859 -35.731,-5.859

## Silkscreen, mask and mechanical layers (free items; w line width, h text height)
Bottom Overlay:
  drawing of 4 lines, arcs and shapes, not listed
  text "SMARTKEY V2.0" at -25.514,-15.971 h1.02
Mechanical 15:
  circle w0.254: c-38.365,-3.27 r1.75
  circle w0.254: c-2.923,-50.558 r1.75
  lines w0.254: -4.848,-50.558 -0.998,-50.558 ; -2.923,-52.483 -2.923,-48.633